# Altium PCB NES-NROM-128 PCB.PcbDoc
Units mm, origin at the board's own origin, x right, y up, seen from the top; angles counter-clockwise.
Board outline 100 x 40 mm, 2 copper layers (Top Layer, Bottom Layer); 4 components, 0 nets, 144 pads, 0 vias.
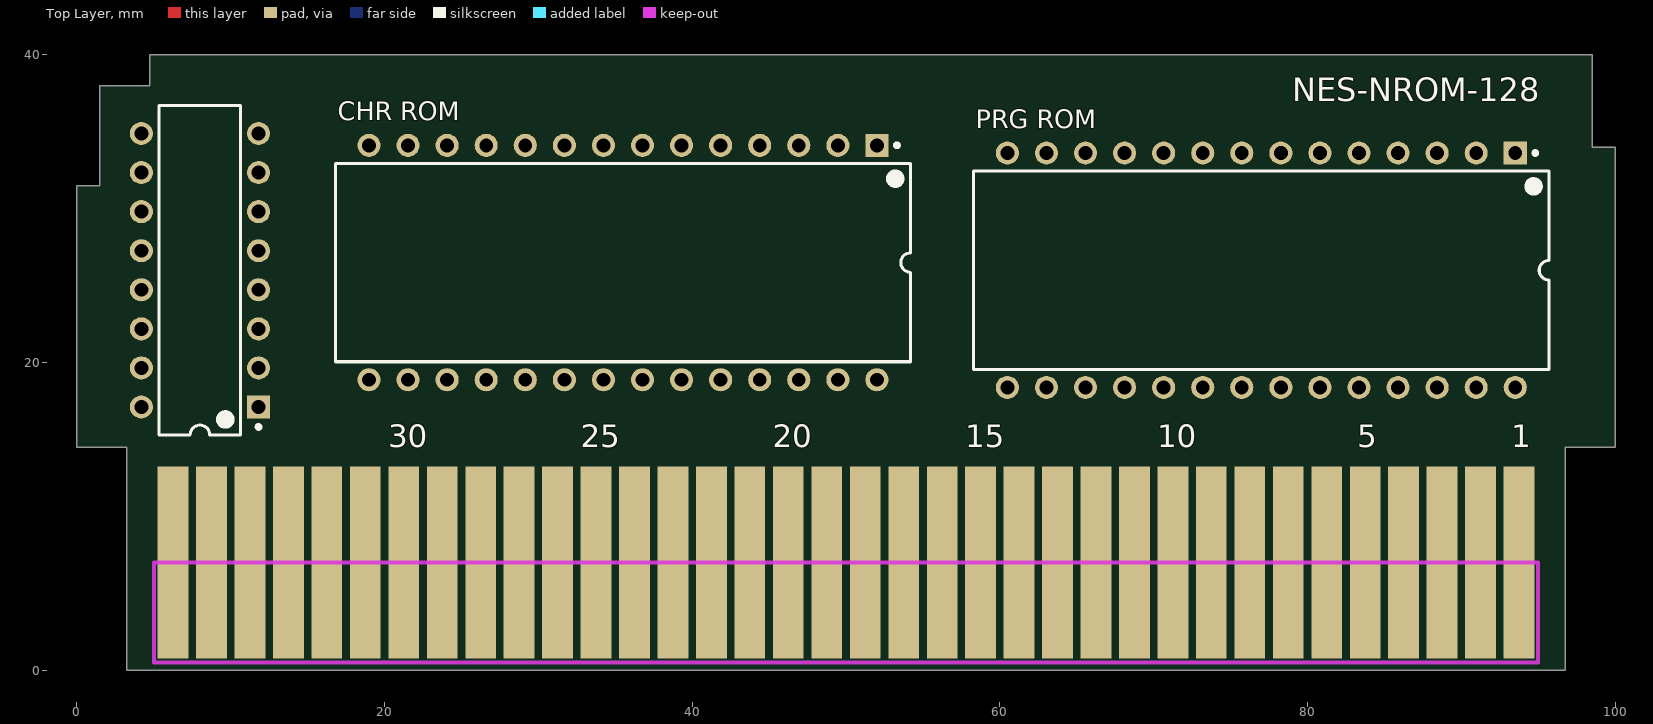
[diagram p0: Top Layer view]
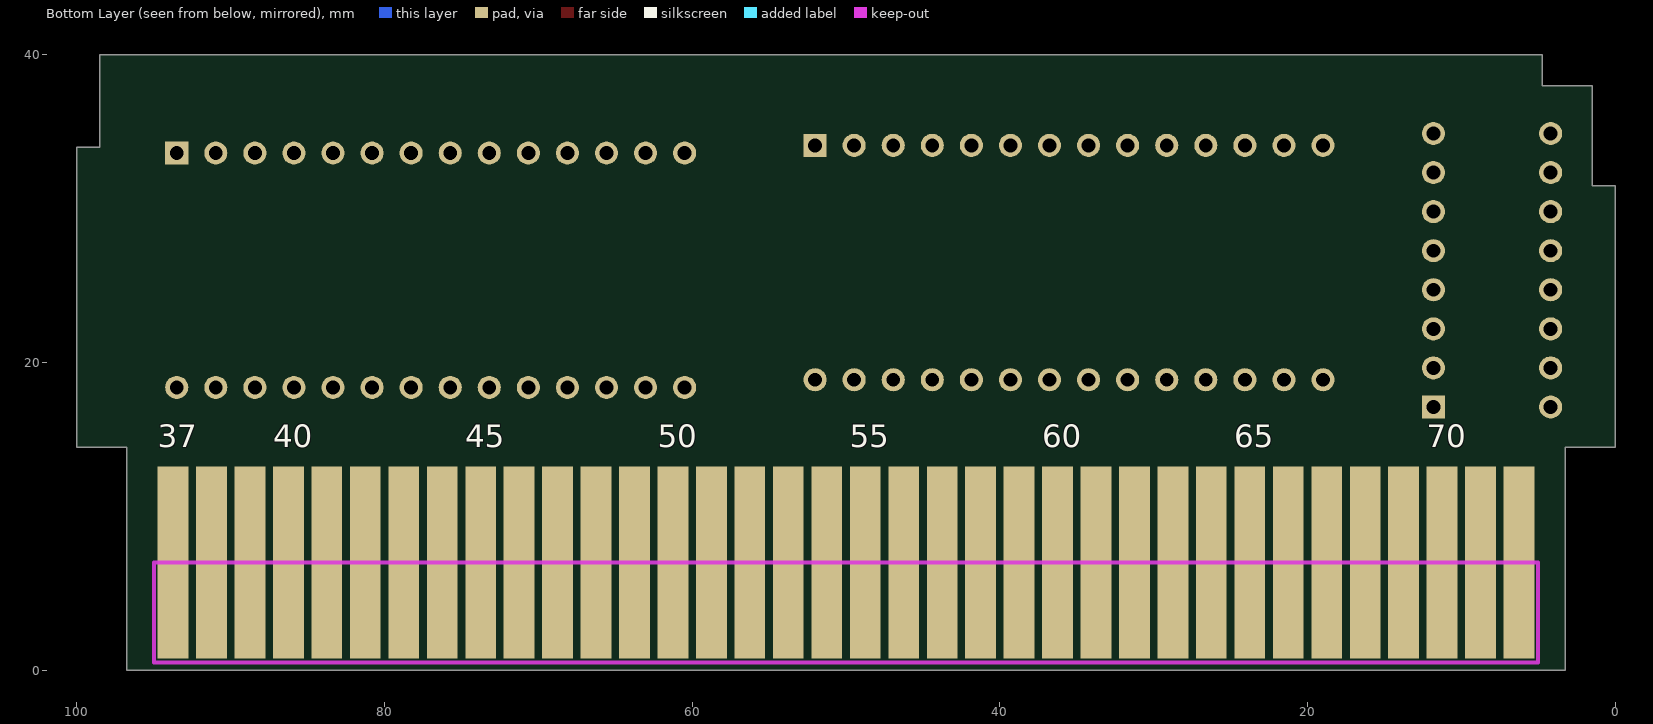
[diagram p1: Bottom Layer view, seen from below]

## Layer stack, top to bottom
Top Layer: signal copper 0.0356
Dielectric: dielectric 0.32, FR-4, Dk 4.8
Bottom Layer: signal copper 0.0356

## Board outline
0,14.5 3.25,14.5 3.25,0 96.75,0 96.75,14.5 100,14.5 100,34 98.5,34 98.5,40 4.75,40 4.75,38 1.5,38 1.5,31.5 0,31.5

## Design rules (kind name [scope] priority, off if disabled: settings)
Clearance [All] p1: gap=0.254
PolygonConnect [All] p1: connectstyle=Relief reliefconductorwidth=0.254 reliefentries=4 polygonreliefangle="90 Angle" airgapwidth=0.254
RoutingVias [All] p1: holewidth=0.711 width=1.27 viastyle="Through Hole" minholewidth=0.711 minwidth=1.27 maxholewidth=0.711 maxwidth=1.27
SolderMaskExpansion [All] p1: expansion=0.102
Width [All] p1: maxlimit=0.254 minlimit=0.254 preferedwidth=0.254
28 further rules are at their usual default settings.

## Classes and differential pairs
component class "NES Cart": "CHR ROM" "PRG ROM"

## Components (designator, comment, footprint, x,y, rotation, side; value= is the part's Value field where it differs from the comment)
"CHR ROM" "27C64" "DIP600-JW28 EPROM w/ window" 35.5,26.5 r270 top
J1 "72 Pin Cart Connector" "72 PIN CART" 50,7 r0 top
"PRG ROM" "27C128" "DIP600-JW28 EPROM W/ WINDOW" 77,26 r270 top
U1 "CIC Lockout" DIP16 8,26 r180 top

## Footprints (in the part's own frame and the unit in brackets; to place one, negate y for a bottom-side part, rotate by r counter-clockwise, add the part's x,y. Pads: shape width x height; smd on the part's side, far side on the other; paste and mask are expansions set on the pad)
"72 PIN CART" [mm] "72 Pin NES Cartridge"
  rect 2x12.5 smd paste-1 mask-1: 1(43.75,0) 2(41.25,0) 3(38.75,0) 4(36.25,0) 5(33.75,0) 6(31.25,0) 7(28.75,0) 8(26.25,0) 9(23.75,0) 10(21.25,0) 11(18.75,0) 12(16.25,0) 13(13.75,0) 14(11.25,0) 15(8.75,0) 16(6.25,0) 17(3.75,0) 18(1.25,0) 19(-1.25,0) 20(-3.75,0) 21(-6.25,0) 22(-8.75,0) 23(-11.25,0) 24(-13.75,0) 25(-16.25,0) 26(-18.75,0) 27(-21.25,0) 28(-23.75,0) 29(-26.25,0) 30(-28.75,0) 31(-31.25,0) 32(-33.75,0) 33(-36.25,0) 34(-38.75,0) 35(-41.25,0) 36(-43.75,0)
  rect 2x12.5 smd far side paste-1 mask-1: 37(43.75,0) 38(41.25,0) 39(38.75,0) 40(36.25,0) 41(33.75,0) 42(31.25,0) 43(28.75,0) 44(26.25,0) 45(23.75,0) 46(21.25,0) 47(18.75,0) 48(16.25,0) 49(13.75,0) 50(11.25,0) 51(8.75,0) 52(6.25,0) 53(3.75,0) 54(1.25,0) 55(-1.25,0) 56(-3.75,0) 57(-6.25,0) 58(-8.75,0) 59(-11.25,0) 60(-13.75,0) 61(-16.25,0) 62(-18.75,0) 63(-21.25,0) 64(-23.75,0) 65(-26.25,0) 66(-28.75,0) 67(-31.25,0) 68(-33.75,0) 69(-36.25,0) 70(-38.75,0) 71(-41.25,0) 72(-43.75,0)
  Keep-Out Layer lines w0.254: -45,-6.5 45,-6.5 45,0 -45,0 -45,-6.5
DIP16 [mm] "DIP, 16-Leads, Row Spacing 7.62mm, Pitch 2.54mm, Body 20.07x6.73mm"
  rect 1.5x1.5 hole 0.9: 1(-3.81,8.89)
  round 1.5 hole 0.9: 2(-3.81,6.35) 3(-3.81,3.81) 4(-3.81,1.27) 5(-3.81,-1.27) 6(-3.81,-3.81) 7(-3.81,-6.35) 8(-3.81,-8.89) 9(3.81,-8.89) 10(3.81,-6.35) 11(3.81,-3.81) 12(3.81,-1.27) 13(3.81,1.27) 14(3.81,3.81) 15(3.81,6.35) 16(3.81,8.89)
  silkscreen extent -3.94,-10.7 2.65,10.7, body extent -3.93,-9.9 3.94,10.1, height 5.1
"DIP600-JW28 EPROM w/ window" [mm] "DIP, 28-Leads, Row Spacing 15.24mm, Pitch 2.54mm, Body 37x13.3mm, Window"
  rect 1.5x1.5 hole 0.9: 1(-7.62,16.51)
  round 1.5 hole 0.9: 2(-7.62,13.97) 3(-7.62,11.43) 4(-7.62,8.89) 5(-7.62,6.35) 6(-7.62,3.81) 7(-7.62,1.27) 8(-7.62,-1.27) 9(-7.62,-3.81) 10(-7.62,-6.35) 11(-7.62,-8.89) 12(-7.62,-11.43) 13(-7.62,-13.97) 14(-7.62,-16.51) 15(7.62,-16.51) 16(7.62,-13.97) 17(7.62,-11.43) 18(7.62,-8.89) 19(7.62,-6.35) 20(7.62,-3.81) 21(7.62,-1.27) 22(7.62,1.27) 23(7.62,3.81) 24(7.62,6.35) 25(7.62,8.89) 26(7.62,11.43) 27(7.62,13.97) 28(7.62,16.51)
  silkscreen extent -7.74,-18.7 6.45,18.7, body extent -7.62,-18.87 7.62,18.47, height 5.79
"DIP600-JW28 EPROM W/ WINDOW" [mm] "DIP, 28-Leads, Row Spacing 15.24mm, Pitch 2.54mm, Body 37x13.3mm, Window"
  rect 1.5x1.5 hole 0.9: 1(-7.62,16.51)
  round 1.5 hole 0.9: 2(-7.62,13.97) 3(-7.62,11.43) 4(-7.62,8.89) 5(-7.62,6.35) 6(-7.62,3.81) 7(-7.62,1.27) 8(-7.62,-1.27) 9(-7.62,-3.81) 10(-7.62,-6.35) 11(-7.62,-8.89) 12(-7.62,-11.43) 13(-7.62,-13.97) 14(-7.62,-16.51) 15(7.62,-16.51) 16(7.62,-13.97) 17(7.62,-11.43) 18(7.62,-8.89) 19(7.62,-6.35) 20(7.62,-3.81) 21(7.62,-1.27) 22(7.62,1.27) 23(7.62,3.81) 24(7.62,6.35) 25(7.62,8.89) 26(7.62,11.43) 27(7.62,13.97) 28(7.62,16.51)
  silkscreen extent -7.74,-18.7 6.45,18.7, body extent -7.62,-18.87 7.62,18.47, height 5.79

## Part data
"CHR ROM": "64K bit (8K x 8) EPROM - 28 pin"
J1: library part "72 Pin Cart", "72 Pin Cartridge Connector"
"PRG ROM": "128K bit (16K x 8) EPROM - 28 pin"
U1: library part CIC, "10NES CIC Lockout Chip"

## Nets (pads, with @x,y where several pads share a name; then routed paths per layer and width w, separated by ;. In a path a pad name is that pad's centre, name@x,y a point inside that pad or via, vN(x,y) a via of type N, cw(c..) or ccw(c..) an arc to the next point about the centre after c; other vN are vias at no path point)
pads on no net: "CHR ROM.1" "CHR ROM.2" "CHR ROM.3" "CHR ROM.4" "CHR ROM.5" "CHR ROM.6" "CHR ROM.7" "CHR ROM.8" "CHR ROM.9" "CHR ROM.10" "CHR ROM.11" "CHR ROM.12" "CHR ROM.13" "CHR ROM.14" "CHR ROM.15" "CHR ROM.16" "CHR ROM.17" "CHR ROM.18" "CHR ROM.19" "CHR ROM.20" "CHR ROM.21" "CHR ROM.22" "CHR ROM.23" "CHR ROM.24" "CHR ROM.25" "CHR ROM.26" "CHR ROM.27" "CHR ROM.28" "PRG ROM.1" "PRG ROM.2" "PRG ROM.3" "PRG ROM.4" "PRG ROM.5" "PRG ROM.6" "PRG ROM.7" "PRG ROM.8" "PRG ROM.9" "PRG ROM.10" "PRG ROM.11" "PRG ROM.12" "PRG ROM.13" "PRG ROM.14" "PRG ROM.15" "PRG ROM.16" "PRG ROM.17" "PRG ROM.18" "PRG ROM.19" "PRG ROM.20" "PRG ROM.21" "PRG ROM.22" "PRG ROM.23" "PRG ROM.24" "PRG ROM.25" "PRG ROM.26" "PRG ROM.27" "PRG ROM.28" J1.1 J1.2 J1.3 J1.4 J1.5 J1.6 J1.7 J1.8 J1.9 J1.10 J1.11 J1.12 J1.13 J1.14 J1.15 J1.16 J1.17 J1.18 J1.19 J1.20 J1.21 J1.22 J1.23 J1.24 J1.25 J1.26 J1.27 J1.28 J1.29 J1.30 J1.31 J1.32 J1.33 J1.34 J1.35 J1.36 J1.37 J1.38 J1.39 J1.40 J1.41 J1.42 J1.43 J1.44 J1.45 J1.46 J1.47 J1.48 J1.49 J1.50 J1.51 J1.52 J1.53 J1.54 J1.55 J1.56 J1.57 J1.58 J1.59 J1.60 J1.61 J1.62 J1.63 J1.64 J1.65 J1.66 J1.67 J1.68 J1.69 J1.70 J1.71 J1.72 U1.1 U1.2 U1.3 U1.4 U1.5 U1.6 U1.7 U1.8 U1.9 U1.10 U1.11 U1.12 U1.13 U1.14 U1.15 U1.16

## Silkscreen, mask and mechanical layers (free items; w line width, h text height)
Top Overlay:
  text "NES-NROM-128" at 79,37 h1.52
Board Outline:
  the board outline again, w0.254

## Text inside footprints (layer, text, board x,y; h text height)
J1: Top Overlay "5" at 83.25,14 h2.5; Top Overlay "10" at 70.25,14 h2.5; Top Overlay "15" at 57.75,14 h2.5; Top Overlay "20" at 45.25,14 h2.5; Top Overlay "25" at 32.75,14 h2.5; Top Overlay "30" at 20.25,14 h2.5; Top Overlay "1" at 93.25,14 h2.5; Bottom Overlay "37" at 94.75,14 h2.5; Bottom Overlay "40" at 87.25,14 h2.5; Bottom Overlay "45" at 74.75,14 h2.5; Bottom Overlay "50" at 62.25,14 h2.5; Bottom Overlay "55" at 49.75,14 h2.5; Bottom Overlay "60" at 37.25,14 h2.5; Bottom Overlay "65" at 24.75,14 h2.5; Bottom Overlay "70" at 12.25,14 h2.5